# EAGLE board charger_v3 (EAGLE 9.6.1)
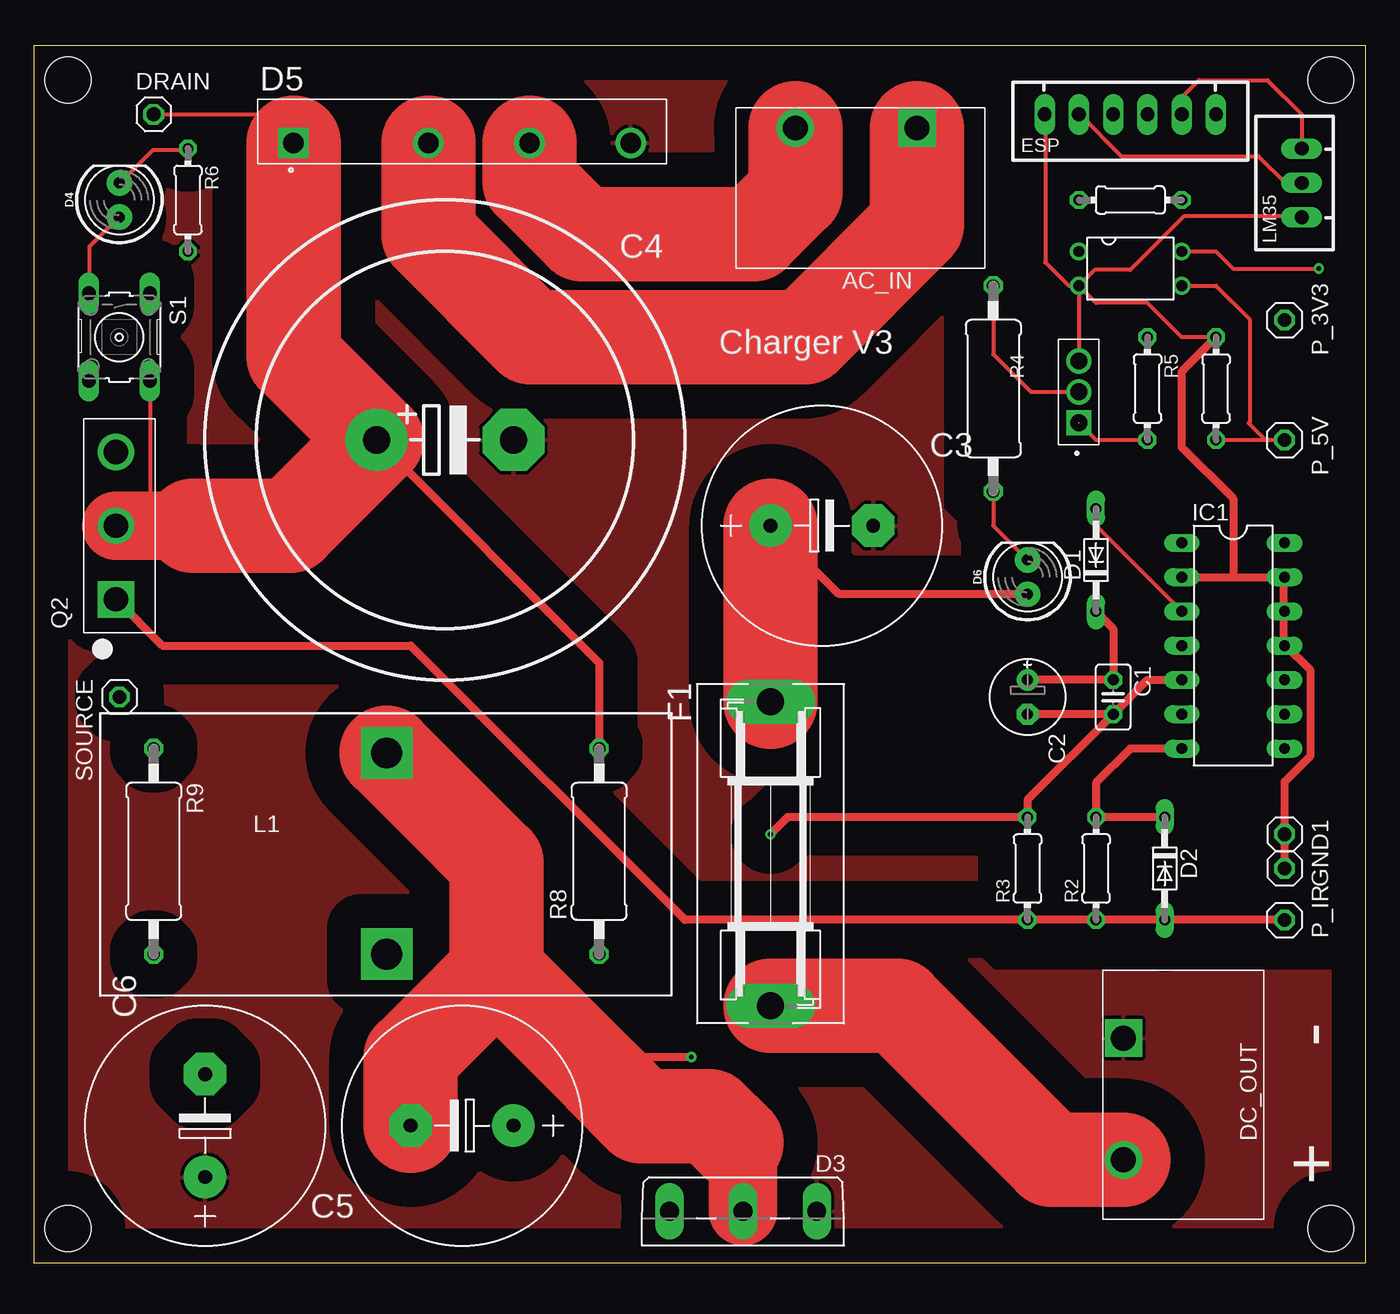
[diagram p0: board, top side]
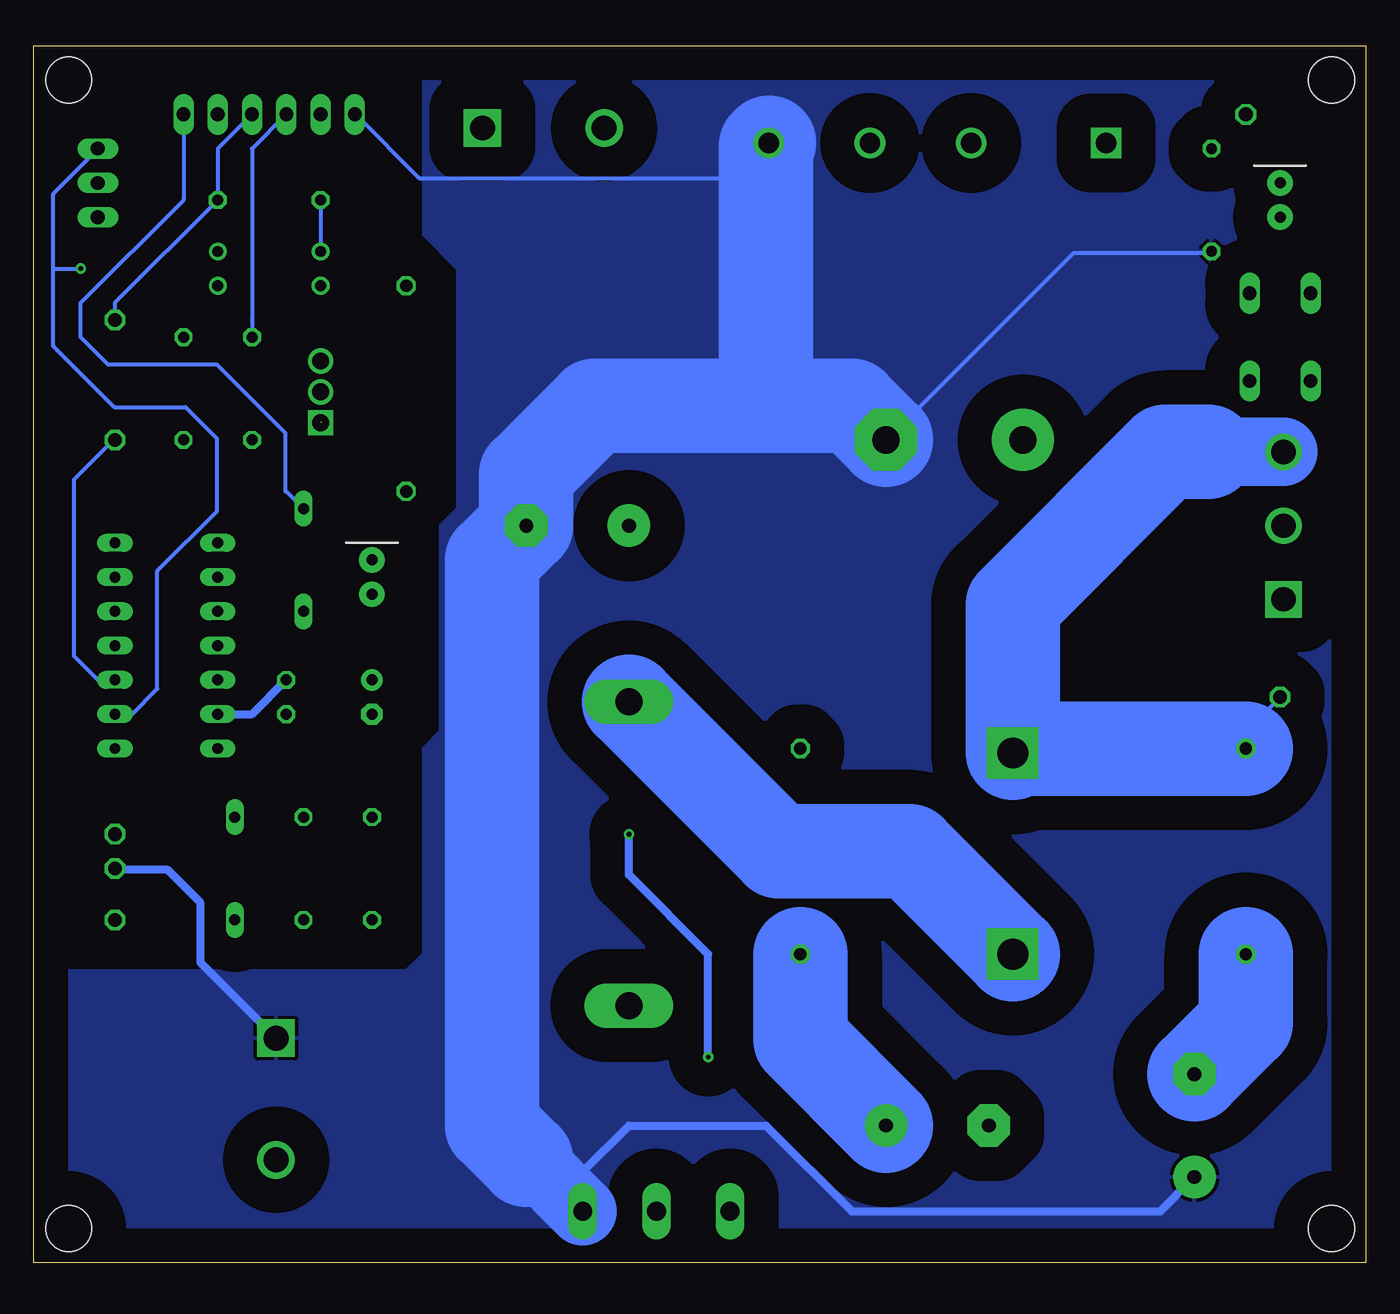
[diagram p1: board, bottom side, seen from below]

Size 98.73 x 90.16 mm. Coordinates in mm from the lower left corner, seen from the top.
Outline: 0,0 98.73,0 98.73,90.16 0,90.16 0,0
Copper layers (1*16): Top 0.035mm / dielectric 1.5mm / Bottom 0.035mm
Design rules "default *": minimum track width 12mil, minimum drill 0.35mm, track to track 12mil, track to pad 12mil, pad to pad 12mil, via to via 12mil, smd to smd 12mil, copper to edge 40mil, drill to drill 6mil, minimum pad ring 10mil, minimum via ring 8mil, stop-mask expansion 4mil, vias tented up to drill 0mil, thermal gap 10mil
Net classes: 0 default: width 0.305 mm; 1 power: width 6.985 mm, clearance 0.508 mm to class 0; 2 pwm_12: width 0.305 mm, clearance 0.508 mm to class 0, clearance 0.508 mm to class 1
Holes 3.4 mm at 2.54,87.63 96.14,87.63 2.54,2.54 96.14,2.54

## Footprints (pad centres in the part's own frame; a part is rotated, then mirrored left to right if it is on the bottom)
TE_1977477-2 = drill 1.85 square: 1 -3.241,-5.334 | drill 1.85: 2 5.781,-5.334
C025-025X050 = drill 0.813 octagon: 1 -1.27,0; 2 1.27,0
E2,5-6E = drill 0.813 pad 1.575: + -1.27,0 | drill 0.813 pad 1.575 octagon: - 1.27,0
E7,5-18 = drill 1.016 pad 3.15: + -3.81,0 | drill 1.016 pad 3.15 octagon: - 3.81,0
EB35D = drill 2.007 pad 4.597: + -5.08,0 | drill 2.007 pad 4.597 octagon: - 5.08,0
DO34-7 = drill 0.813 long: A 3.81,0; C -3.81,0
SOT93S = drill 1.397 long: A1 -5.461,-2.54; A2 5.461,-2.54; C 0,-2.54
LED_5MM = drill 0.813 pad 1.88: A -1.27,0; K 1.27,0
DIOB_GBJ3510-BP = drill 1.51 pad 2.27 square: 1 -12.5,-0.85 | drill 1.51 pad 2.27: 2 -2.5,-0.85; 3 5,-0.85; 4 12.5,-0.85
1X01 = drill 1.016 octagon: 1 0,0
JST-XH-06-PACKAGE-LONG-PAD = drill 1.016 long: 1 -6.35,0; 2 -3.81,0; 3 -1.27,0; 4 1.27,0; 5 3.81,0; 6 6.35,0
FUSEHOLDER = drill 2.007 pad 3.302 long: 1 -11.252,0; 2 11.252,0
DIL14 = drill 0.813 long: 1 -7.62,-3.81; 2 -5.08,-3.81; 3 -2.54,-3.81; 4 0,-3.81; 5 2.54,-3.81; 6 5.08,-3.81; 7 7.62,-3.81; 8 7.62,3.81; 9 5.08,3.81; 10 2.54,3.81; 11 0,3.81; 12 -2.54,3.81; 13 -5.08,3.81; 14 -7.62,3.81
TJ7-U1 = drill 2.286 pad 3.81 square: 1 -6.503,4.826; 2 8.408,4.826
JST-XH-03-PACKAGE-LONG-PAD = drill 1.016 long: 1 -2.54,0; 2 0,0; 3 2.54,0
DIP4 = drill 0.8: 1 -1.27,-3.81; 2 1.27,-3.81; 3 1.27,3.81; 4 -1.27,3.81
TO247AC = drill 1.79 pad 2.69 square: 1 -5.46,0.255 | drill 1.79 pad 2.69: 2 0,0.255; 3 5.46,0.255
TO229P780X300X1364-3 = drill 1.25 square: 1 0,0 | drill 1.25: 2 2.29,0; 3 4.58,0
0204/7 = drill 0.813 octagon: 1 -3.81,0; 2 3.81,0
0411/15 = drill 0.914 octagon: 1 -7.62,0; 2 7.62,0
B3F-10XX = drill 1.016 long: 1 -3.251,2.261; 2 3.251,2.261; 3 -3.251,-2.261; 4 3.251,-2.261

## Placement (x,y rotation side)
AC_IN  1977477-2  [TE_1977477-2]  62.23,78.74 180 top
C1  100nF  [C025-025X050]  80.01,41.91 270 top
C2  22uF  [E2,5-6E]  73.66,41.91 270 top
C3  150uF  [E7,5-18]  58.42,54.61 0 top
C4  470uF  [EB35D]  30.48,60.96 0 top
C5  22uF  [E7,5-18]  31.75,10.16 180 top
C6  22uF  [E7,5-18]  12.7,10.16 90 top
D1  UF4007  [DO34-7]  78.74,52.07 90 top
D2  UF4007  [DO34-7]  83.82,29.21 270 top
D3  PBYR3035  [SOT93S]  52.58,1.27 180 top
D4  [LED_5MM]  6.35,78.74 90 top
D5  GBJ3510-BP  [DIOB_GBJ3510-BP]  31.75,83.82 0 top
D6  [LED_5MM]  73.66,50.8 90 top
DC_OUT  1977477-2  [TE_1977477-2]  86.11,13.4 270 top
DRAIN  [1X01]  8.89,85.09 0 top
ESP  JST-XH-06-PIN-LONG-PAD  [JST-XH-06-PACKAGE-LONG-PAD]  81.28,85.09 180 top
F1  [FUSEHOLDER]  54.61,30.3 270 top
GND1  [1X01]  92.71,31.75 0 top
GND2  [1X01]  92.71,29.21 0 top
IC1  IR2110D  [DIL14]  88.9,45.72 270 top
L1  1mH  [TJ7-U1]  21.34,31.27 270 top
LM35  JST-XH-03-PIN-LONG-PAD  [JST-XH-03-PACKAGE-LONG-PAD]  93.98,80.01 90 top
OK1  SFH618A-5  [DIP4]  81.28,73.66 270 top
P_3V3  [1X01]  92.71,69.85 90 top
P_5V  [1X01]  92.71,60.96 90 top
P_IR  [1X01]  92.71,25.4 90 top
Q2  IRFP240  [TO247AC]  6.35,54.61 90 top
Q3  MJE13003G  [TO229P780X300X1364-3]  77.47,62.23 90 top
R1  180  [0204/7]  81.28,78.74 180 top
R2  10  [0204/7]  78.74,29.21 90 top
R3  1k  [0204/7]  73.66,29.21 90 top
R4  68k  [0411/15]  71.12,64.77 270 top
R5  2.7k  [0204/7]  82.55,64.77 270 top
R6  10k  [0204/7]  11.43,78.74 270 top
R7  1k  [0204/7]  87.63,64.77 270 top
R8  31  [0411/15]  41.91,30.48 90 top
R9  31  [0411/15]  8.89,30.48 270 top
S1  [B3F-10XX]  6.35,68.58 270 top
SOURCE  [1X01]  6.35,41.91 0 top

## Library data of the parts
AC_IN DC_OUT = terminal_block_TA; AVAILABILITY: In Stock; COMMENT: 1977477-2; DESCRIPTION: Conn Barrier Strip 2 POS 8.25mm Solder ST Thru-Hole 15A/Contact Carton; MF: TE Connectivity; MP: 1977477-2; PACKAGE: None; PRICE: None; PURCHASE-URL: https://pricing.snapeda.com/search/part/1977477-2/?ref=eda
C1-C6 = rcl; SPICEPREFIX: C
D1-D3 = diode
D4 D6 = Sparkfun_LED
D5 = GBJ3510-BP; AVAILABILITY: In Stock; DESCRIPTION: Bridge Rectifier Single Phase Standard 1 kV Through Hole GBJ; MF: Micro Commercial; MP: GBJ3510-BP; PACKAGE: SIP-4 Micro Commercial Co; PRICE: None; PURCHASE-URL: https://pricing.snapeda.com/search/part/GBJ3510-BP/?ref=eda
DRAIN GND1 GND2 P_3V3 P_5V P_IR SOURCE = pinhead
ESP LM35 = Rembrandt Electronics - JST XH Connectors v1-0
F1 = TA_library; MPN: 0031.7701.11; OC_FARNELL: unknown; OC_NEWARK: 04F1224
IC1 = irs
L1 = custom_inductor; SPICEPREFIX: L
OK1 = optocoupler; MF: VISHAY/TELEFUNKEN; MPN: SFH618A-5; OC_FARNELL: 1469593; OC_NEWARK: 59K0259
Q2 = IRFP240(TO-247); AVAILABILITY: In Stock; DESCRIPTION: N-Channel 200 V 20A (Tc) 150W (Tc) Through Hole TO-247AC; MF: Vishay Siliconix; MP: IRFP240; PACKAGE: TO-247 Vishay Siliconix; PRICE: None
Q3 = MJE13003G; AVAILABILITY: Not in stock; DESCRIPTION: Bipolar (BJT) Transistor NPN 400 V 1.5 A 10MHz 1.4 W Through Hole TO-126; MF: ON Semiconductor; MP: MJE13003G; PACKAGE: TO-126 ON Semiconductor; PRICE: None
R1-R9 = rcl; SPICEPREFIX: R
S1 = switch-omron; MPN: B3F-1000; OC_FARNELL: 176432; OC_NEWARK: 36M3542

## Nets
5V: ESP.2 IC1.9 LM35.3 OK1.4
12V: D1.A ESP.1 IC1.3
AC_1 [power]: AC_IN.1 D5.2
AC_2 [power]: AC_IN.2 D5.3
GND: C3.- C4.- C6.+ D3.A1 D5.4 DC_OUT.1 ESP.6 GND1.1 GND2.1 IC1.2 IC1.11 IC1.12 IC1.13 LM35.1 OK1.2 Q3.3 R6.2 R7.1
HVDC: C4.+ D5.1 DRAIN.1 Q2.2 R8.2 S1.2
N$1: D2.C IC1.7 R2.2
N$2: D4.A S1.3
N$3: Q3.2 R4.1
N$4: D6.K R4.2
N$5: Q3.1 R5.2
N$6: C5.+ R8.1
N$7: C6.- R9.2
N$8: D4.K R6.1
N$9: OK1.1 R1.2
NMOS_SOURCE: C1.2 C2.- C5.- D3.C IC1.5 L1.1 Q2.3 R3.2 R9.1 SOURCE.1
PWM_5V: IC1.10 OK1.3 P_5V.1 R7.2
PWM_12V [pwm_12]: D2.A P_IR.1 Q2.1 R2.1 R3.1
PWM_SW1: ESP.3 P_3V3.1 R1.1
PWM_SW2: ESP.4 R5.1
TEMP: ESP.5 LM35.2
V_OUT: C3.+ D6.A F1.1 L1.2
V_OUT_FUSE [power]: DC_OUT.2 F1.2
VB: C1.1 C2.+ D1.C IC1.6

## Tracks (layer width: path | path; a pad name or v marks a point on that pad's centre or on a via)
5V  (via drill 0.35)
  Top 0.305: LM35.3 93.98,85.09 91.44,87.63 86.36,87.63 85.09,86.36 ESP.2 | OK1.4 87.63,74.93 88.9,73.66 v95.25,73.66
  Bottom 0.305: IC1.9 91.44,40.64 89.56,42.52 89.56,51.26 85.14,55.68 85.14,61.06 87.48,63.4 92.76,63.4 97.28,67.92 97.28,73.66 | 97.28,73.66 97.28,79.2 94.03,82.45 LM35.3 | 97.28,73.66 v95.25,73.66
12V
  Top 0.305: IC1.3 78.79,54.56 78.79,55.88 D1.A
  Bottom 0.305: ESP.1 87.63,78.74 95.25,71.12 95.25,68.58 93.22,66.55 85.14,66.55 80.06,61.47 80.06,57.15 80.01,57.15 D1.A
AC_1
  Top 6.985: AC_IN.1 65.47,76.9 57.15,68.58 36.83,68.58 29.25,76.16 D5.2
AC_2
  Top 6.985: AC_IN.2 56.45,79.31 53.34,76.2 40.64,76.2 36.75,80.09 D5.3
GND
  Top 0.305: 35.66,60.96 C4.- | GND2.1 92.81,29.26 92.81,31.7 GND1.1 92.81,31.85 | 92.66,50.9 IC1.13 92.66,50.75 92.66,48.31 IC1.12 92.66,48.16 92.66,45.72 IC1.11 92.81,45.72 | OK1.2 76.71,72.39 74.98,74.12 74.98,85.04 ESP.6 | LM35.1 93.88,77.57 85.29,77.57 81.28,73.56 78.64,73.56 OK1.2 | OK1.2 Q3.3 | OK1.2 78.74,71.12 82.55,71.12 85.09,68.58 R7.1
  Top 0.61: GND2.1 92.71,35.64 94.64,37.57 94.64,43.89 92.81,45.72 | IC1.11 92.66,45.77 92.66,50.9 92.56,50.8 88.9,50.8 | 88.9,50.8 88.9,56.62 85.09,60.43 85.09,65.99 85.14,66.04 85.14,66.09 R7.1 | IC1.2 88.9,50.8
  Bottom 0.305: R6.2 11.43,74.83 21.64,74.83 35.51,60.96 C4.- | 44.2,82.91 D5.4 46.85,80.37 70.16,80.37 74.83,85.04 ESP.6 | D3.A1 58.04,6.25 | 12.8,6.25 C6.+
  Bottom 0.61: GND2.1 92.61,29.11 88.8,29.11 86.36,26.67 86.36,22.23 DC_OUT.1 | D3.A1 58.04,6.73 54.61,10.16 44.45,10.16 38.1,3.81 15.24,3.81 12.8,6.25
  Bottom 3.81: 64.39,10.16 64.77,10.16
  Bottom 5.08: D3.A1 61.85,7.62 62.23,7.62
  Bottom 6.985: 62.23,7.62 64.77,10.16 64.77,52.07 C3.- 62.23,58.42 57.15,63.5 44.45,63.5 | C4.- 38.1,63.5 44.45,63.5 | D5.4 44.45,82.77 44.45,63.5
  pour Top (isolate 2.54): -10.16,95.25 69.85,95.25 69.85,76.2 67.31,73.66 67.31,55.88 68.58,54.61 68.58,39.37 69.85,38.1 69.85,22.86 71.12,21.59 96.52,21.59 99.06,19.05 99.06,-7.62 -10.16,-7.62
  pour Bottom (isolate 2.54): -12.7,97.79 69.85,97.79 69.85,76.2 67.31,73.66 67.31,55.88 68.58,54.61 68.58,39.37 69.85,38.1 69.85,22.86 71.12,21.59 96.52,21.59 99.06,19.05 99.06,-7.62 -12.7,-7.62
HVDC
  Top 0.305: 8.69,54.61 8.69,56.99 | 8.69,56.99 8.69,65.23 S1.2 | 8.69,56.99 8.73,56.99 8.73,54.61 | DRAIN.1 17.13,85.09 D5.1
  Top 0.61: R8.2 41.91,44.45 C4.+
  Top 5.08: Q2.2 8.73,54.61 11.81,54.61
  Top 6.985: D5.1 19.25,67.11 C4.+ 19.05,54.61 11.81,54.61
N$1
  Top 0.61: IC1.7 81.28,38.1 78.74,35.56 R2.2 D2.C
N$2
  Top 0.305: S1.3 4.12,71.93 4.12,75.29 6.25,77.42 D4.A
N$3
  Top 0.305: R4.1 71.12,67.31 73.91,64.52 Q3.2
N$4
  Top 0.305: 73.74,52.07 D6.K 71.12,54.61 R4.2
N$5  (1 unrouted)
  Top 0.305: 77.42,62.28 78.74,60.96 R5.2
N$6
  Bottom 6.985: R8.1 41.91,16.51 C5.+
N$7
  Bottom 6.985: C6.- 8.89,17.78 R9.2
N$8
  Top 0.305: R6.1 11.43,82.45 8.84,82.45 6.4,80.01 D4.K
N$9
  Bottom 0.305: R1.2 OK1.1
NMOS_SOURCE  (via drill 0.35)
  Top 0.61: C1.2 82.55,43.18 IC1.5 | C1.2 C2.- | C1.2 73.66,34.29 R3.2 55.88,33.02 v54.61,31.75 | v48.74,15.24 43.66,15.24 42.15,13.73
  Top 5.08: D3.C 52.58,8.38 52.07,8.89
  Top 6.985: L1.1 34.29,29.64 34.29,21.59 | 34.29,21.59 42.15,13.73 45.02,10.86 50.1,10.86 52.07,8.89 | C5.- 27.94,15.24 34.29,21.59
  Bottom 0.305: SOURCE.1 8.89,39.37 R9.1
  Bottom 0.61: v48.74,15.24 48.74,22.86 54.61,28.73 v54.61,31.75
  Bottom 5.08: Q2.3 11.68,60.07
  Bottom 6.985: 11.68,60.07 14.86,60.07 26.16,48.77 L1.1 25.83,38.1 R9.1
PWM_5V
  Top 0.305: OK1.3 87.63,72.39 90.12,69.9 90.12,62.28 90.04,62.2 91.29,60.96 | R7.2 91.29,60.96 | 91.29,60.96 P_5V.1
  Bottom 0.305: IC1.10 93.98,43.18 95.76,44.96 95.76,58.01 92.81,60.96 P_5V.1
PWM_12V
  Top 0.305: R2.1 D2.A
  Top 0.61: P_IR.1 D2.A R3.1 48.26,25.4 27.94,45.72 9.53,45.72 Q2.1
PWM_SW1
  Bottom 0.305: P_3V3.1 92.71,71.12 R1.1 85.09,82.55 ESP.3
PWM_SW2
  Bottom 0.305: ESP.4 82.55,82.55 R5.1 82.55,69.85
TEMP
  Top 0.305: LM35.2 92.76,80.01 90.78,81.99 80.62,81.99 77.57,85.04 ESP.5
V_OUT
  Top 0.61: D6.A 59.69,49.53 C3.+
  Top 6.985: F1.1 C3.+
  Bottom 6.985: L1.2 33.78,30.48 43.54,30.48 F1.1
V_OUT_FUSE
  Top 6.985: F1.2 64.01,19.05 75.44,7.62 DC_OUT.2
VB
  Top 0.61: D1.C 80.01,46.99 C1.1 C2.+
  Bottom 0.61: IC1.6 82.55,40.64 C1.1

## Text on the board
tPlace: - | +
tNames: Charger V3